# Altium PCB PCB1.PcbDoc
Units mm, origin at the board's own origin, x right, y up, seen from the top; angles counter-clockwise.
Board outline 67 x 48 mm, 2 copper layers (Top Layer, Bottom Layer); 55 components, 52 nets, 191 pads, 26 vias.
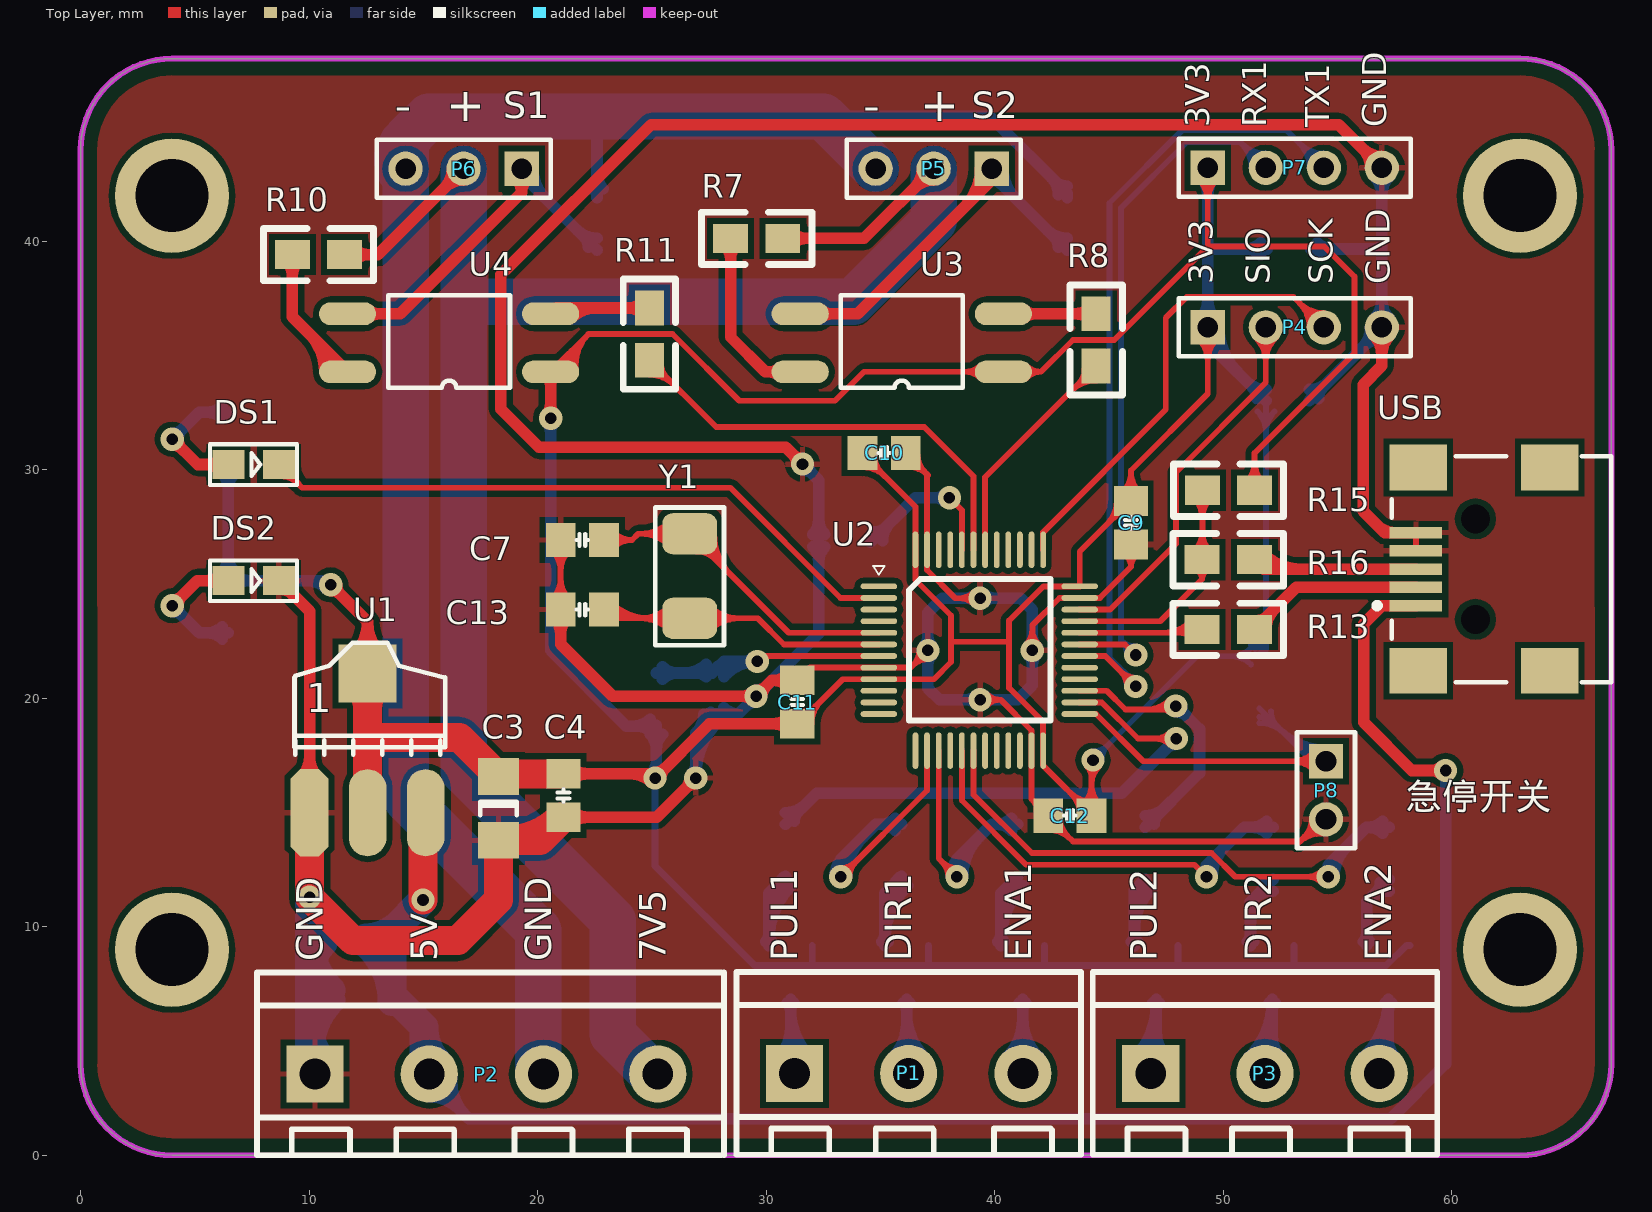
[diagram p0: Top Layer view]
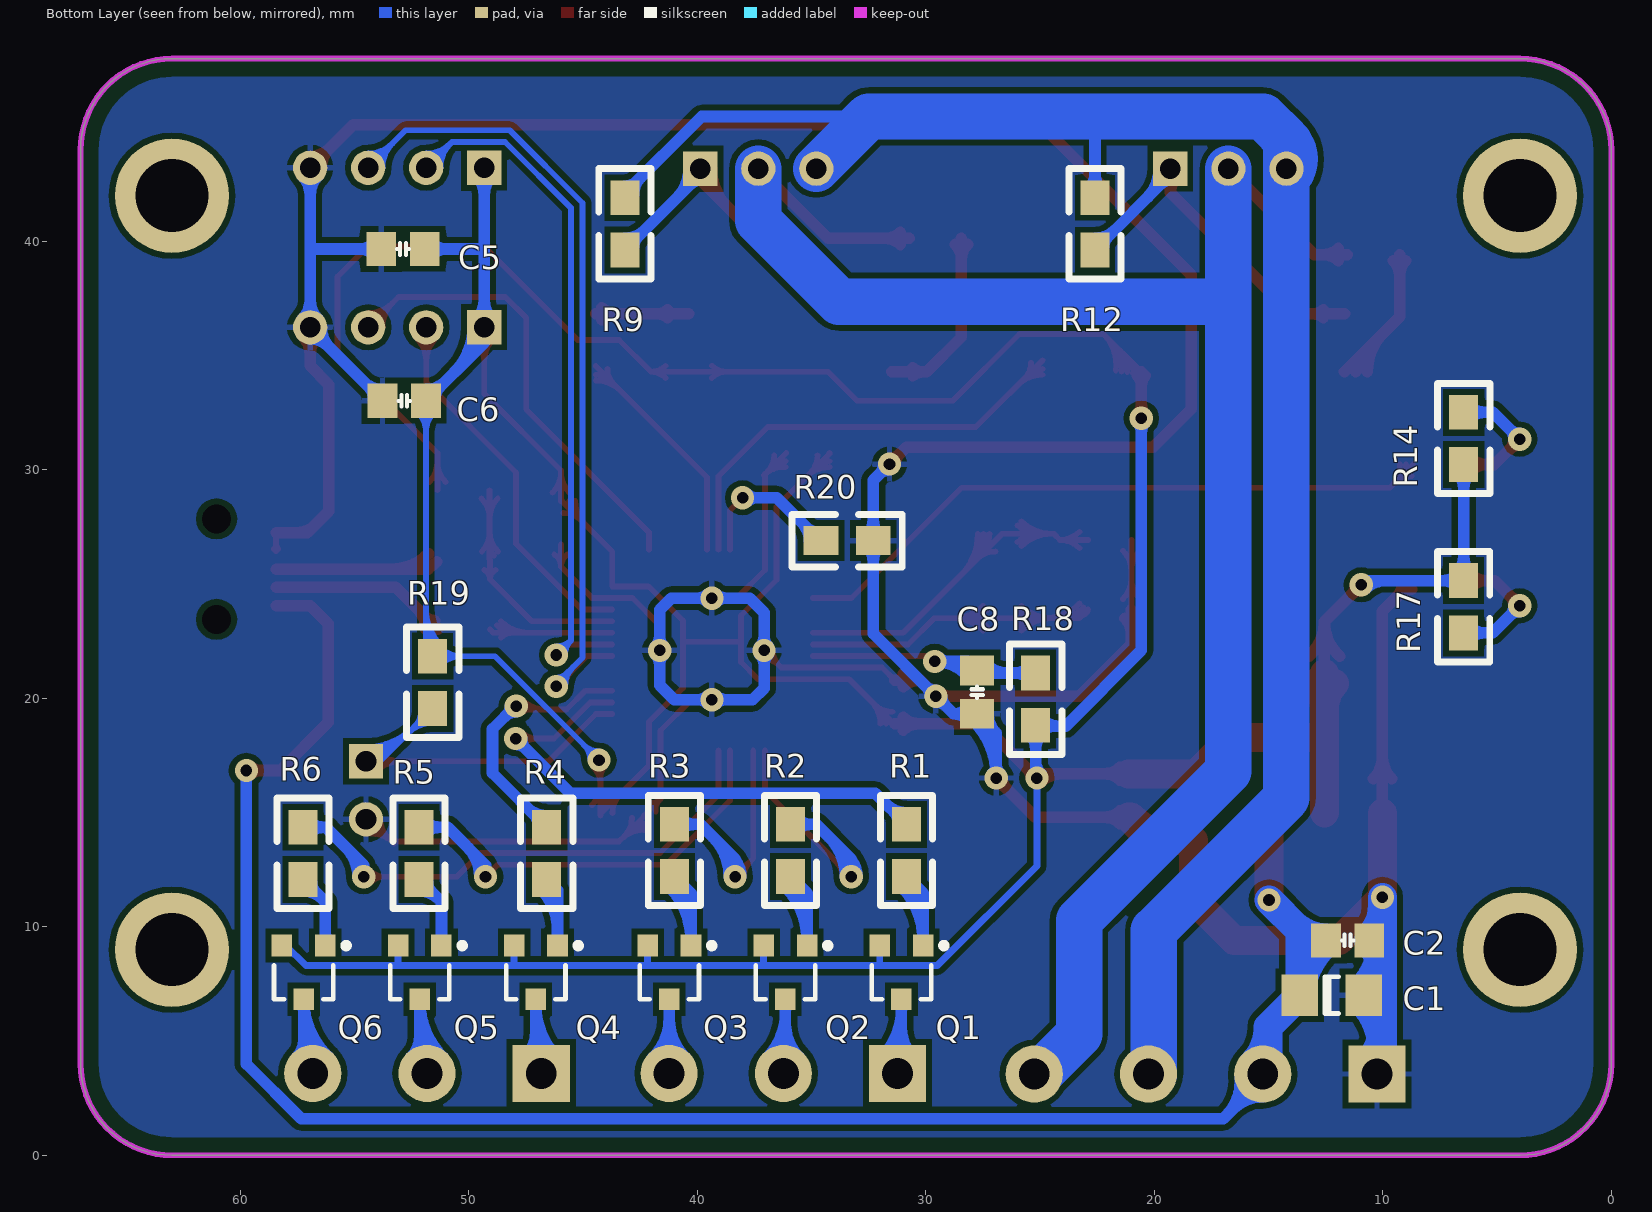
[diagram p1: Bottom Layer view, seen from below]

## Layer stack, top to bottom
Top Layer: signal copper 0.0356
Dielectric: dielectric 0.32, FR-4, Dk 4.8
Bottom Layer: signal copper 0.0356

## Board outline
0,4 0,44 cw(c4,44) 4,48 63,48 cw(c63,44) 67,44 67,4 cw(c63,4) 63,0 4,0 cw(c4,4)

## Design rules (kind name [scope] priority, off if disabled: settings)
Clearance [All] p1: gap=0.254
HoleSize [All] p1: absolutevalues=TRUE maxlimit=25.4 minlimit=0.025 maxpercent=80.000 minpercent=20.000
MinimumSolderMaskSliver [All] p1: minsoldermaskwidth=0.051
PolygonConnect [All] p1: connectstyle=Relief reliefconductorwidth=0.254 reliefentries=4 polygonreliefangle="90 Angle"
RoutingVias [All] p1: holewidth=0.508 width=1.016 viastyle="Through Hole" minholewidth=0.406 minwidth=0.508 maxholewidth=0.711 maxwidth=1.27
SilkscreenOverComponentPads [All] p1: minsilkscreentomaskgap=0
SolderMaskExpansion [All] p1: expansion=0.102
TestPointUsage [All] p1: valid=0 allowmultiple=FALSE
Testpoint [All] p1: side=15 testpointundercomponent=TRUE minsize=1.016 maxsize=2.54 preferedsize=1.524 minholesize=0 maxholesize=1.016 preferedholesize=0.813 testpointgrid=0.025 style=1023 order=0-112345678
Width [All] p1: maxlimit=2.54 minlimit=0.254 preferedwidth=0.254
21 further rules are at their usual default settings.

## Components (designator, comment, footprint, x,y, rotation, side; value= is the part's Value field where it differs from the comment)
C1 "Cap Pol" 钽电容 14.594,5.85 r90 bottom
C2 "104" 0805C 11.546,9.406 r0 bottom
C3 "Cap Pol" 钽电容 17.134,17.534 r0 top
C4 "104" 0805C 21.133,15.748 r90 top
C5 "104" 0805C 52.889,39.665 r0 bottom
C6 "104" 0805C 52.832,33.02 r0 bottom
C7 "20pF" 0805C 21.96,26.932 r0 top
C8 "104" 0805C 27.762,20.269 r270 bottom
C9 "104" 0805C 45.974,27.686 r270 top
C10 "104" 0805C 35.168,30.742 r0 top
C11 "104" 0805C 31.369,19.837 r90 top
C12 "104" 0805C 43.296,14.867 r180 top
C13 "20pF" 0805C 21.96,23.884 r0 top
DS1 "LED1" SMDLED 6.466,30.234 r0 top
DS2 "LED1" SMDLED 6.466,25.154 r0 top
P1 "电机1接口" KF301-3P 31.242,3.581 r0 top
P2 "4P接线端子" KF301-4P 10.262,3.556 r0 top
P3 "电机2接口" KF301-3P 46.838,3.581 r0 top
P4 "SWD" HDR1X4 49.333,36.236 r0 top
P5 "Header 3" HDR1X3 39.878,43.18 r180 top
P6 "Header 3" HDR1X3 19.304,43.18 r180 top
P7 "串口" HDR1X4 49.333,43.221 r0 top
P8 "Header 2" HDR1X2 54.508,17.247 r270 top
Q1 "S8550" SOT-23R 31.074,8.136 r0 bottom
Q2 "S8550" SOT-23R 36.154,8.136 r0 bottom
Q3 "S8550" SOT-23R 41.234,8.136 r0 bottom
Q4 "S8550" SOT-23R 47.076,8.136 r0 bottom
Q5 "S8550" SOT-23R 52.156,8.136 r0 bottom
Q6 "S8550" SOT-23R 57.236,8.136 r0 bottom
R1 "4.7K" 0805 30.85,14.486 r270 bottom
R2 "4.7K" 0805 35.93,14.486 r270 bottom
R3 "4.7K" 0805 41.01,14.486 r270 bottom
R4 "4.7K" 0805 46.598,14.359 r270 bottom
R5 "4.7K" 0805 52.186,14.359 r270 bottom
R6 "4.7K" 0805 57.266,14.359 r270 bottom
R7 "470R" 0805 28.448,40.132 r0 top
R8 "1k" 0805 44.45,34.544 r90 top
R9 "1K" 0805 43.18,39.624 r90 bottom
R10 "470R" 0805 9.271,39.421 r0 top
R11 "1k" 0805 24.892,34.798 r90 top
R12 "1K" 0805 22.606,39.624 r90 bottom
R13 "22R" 0805 51.372,23.017 r180 top
R14 "1K" 0805 6.467,30.232 r90 bottom
R15 "1.5K" 0805 49.098,29.108 r0 top
R16 "22R" 0805 51.372,26.065 r180 top
R17 "1K" 0805 6.467,25.152 r270 bottom
R18 "10K" 0805 25.197,21.107 r270 bottom
R19 "10K" 0805 51.587,21.844 r270 bottom
R20 "10K" 0805 32.309,26.899 r0 bottom
U1 "AMS1117-3.3" AMS1117 10.022,14.994 r0 top
U2 "STM32F103C8T6" LQF48 34.152,25.027 r0 top
U3 "TLP521-1" SOP-4_(TLP521) 40.386,34.29 r180 top
U4 "TLP521-1" SOP-4_(TLP521) 20.574,34.29 r180 top
USB "USB" USB/SM0.8-6H5 66.294,25.654 r0 top
Y1 "8MHz" SMD-5032 26.659,23.503 r90 top

## Footprints (in the part's own frame and the unit in brackets; to place one, negate y for a bottom-side part, rotate by r counter-clockwise, add the part's x,y. Pads: shape width x height; smd on the part's side, far side on the other; paste and mask are expansions set on the pad)
0805 [mil]
  rect 60x50 smd: 1(0,-0.06) 2(90,-0.06)
  silkscreen extent -50,-45 140,45
0805C [mm] "Chip Capacitor; Body 2.0 x 1.2 mm (LxW typ)"
  rect 1.3x1.5 smd: 1(-0.95,0) 2(0.95,0)
  silkscreen extent -0.25,-0.25 0.25,0.25
AMS1117 [mil]
  oct 65x150 smd: 1(0.03,-0.06)
  oval 65x150 smd: 2(100.03,-0.06) 3(200.03,-0.06)
  rect 100x100 smd: 4(100.03,239.94)
  silkscreen extent -26,100 234,293
HDR1X2 [mm] "Connector; Header; 2 Position"
  rect 1.5x1.5 hole 0.9: 1(0,0)
  round 1.5 hole 0.9: 2(2.54,0)
  silkscreen extent -1.27,-1.27 3.81,1.27
HDR1X3 [mm] "Connector; Header; 3 Position"
  rect 1.5x1.5 hole 0.9: 1(0,0)
  round 1.5 hole 0.9: 2(2.54,0) 3(5.08,0)
  silkscreen extent -1.27,-1.27 6.35,1.27
HDR1X4 [mm] "Connector; Header; 4 Position"
  rect 1.5x1.5 hole 0.9: 1(0,0)
  round 1.5 hole 0.9: 2(2.54,0) 3(5.08,0) 4(7.62,0)
  silkscreen extent -1.27,-1.27 8.89,1.27
KF301-3P [mm]
  rect 2.5x2.5 hole 1.35: 1(0,0)
  round 2.5 hole 1.35: 2(5,0) 3(10,0)
  silkscreen extent -2.54,-3.56 12.54,4.44
KF301-4P [mm]
  rect 2.5x2.5 hole 1.35: 1(0,0)
  round 2.5 hole 1.35: 2(5,0) 3(10,0) 4(15,0)
  silkscreen extent -2.54,-3.56 17.9,4.44
LQF48 [mm]
  oval 1.6x0.25 smd: 1(0.787,-0.127) 2(0.787,-0.635) 3(0.787,-1.143) 4(0.787,-1.651) 5(0.787,-2.159) 6(0.787,-2.667) 7(0.787,-3.175) 8(0.787,-3.683) 9(0.787,-4.191) 10(0.787,-4.699) 11(0.787,-5.207) 12(0.787,-5.715) 25(9.576,-5.715) 26(9.576,-5.207) 27(9.576,-4.699) 28(9.576,-4.191) 29(9.576,-3.683) 30(9.576,-3.175) 31(9.576,-2.667) 32(9.576,-2.159) 33(9.576,-1.651) 34(9.576,-1.143) 35(9.576,-0.635) 36(9.576,-0.127)
  oval 0.25x1.6 smd: 13(2.388,-7.315) 14(2.896,-7.315) 15(3.404,-7.315) 16(3.912,-7.315) 17(4.42,-7.315) 18(4.928,-7.315) 19(5.436,-7.315) 20(5.944,-7.315) 21(6.452,-7.315) 22(6.96,-7.315) 23(7.468,-7.315) 24(7.976,-7.315) 37(7.976,1.473) 38(7.468,1.473) 39(6.96,1.473) 40(6.452,1.473) 41(5.944,1.473) 42(5.436,1.473) 43(4.928,1.473) 44(4.42,1.473) 45(3.912,1.473) 46(3.404,1.473) 47(2.896,1.473) 48(2.388,1.473)
  silkscreen extent 0.53,-6 8.3,0.76
SMD-5032 [mm]
  rrect50% 1.8x2.4 smd: 1(0,0) 2(3.7,0)
  silkscreen extent -1.17,-1.5 4.85,1.5
SMDLED [mm]
  rect 1.4x1.27 smd: 1(0.001,-0.002) 2(2.211,-0.002)
  silkscreen extent -0.8,-0.89 3.01,0.89
SOP-4_(TLP521) [mm]
  oval 2.5x1 smd: 1(0,0) 2(0,-2.54) 3(8.89,-2.54) 4(8.89,0)
  silkscreen extent 1.78,-3.36 7.11,0.7
SOT-23R [mm]
  rect 0.9x0.95 smd: 1(0.95,-1.048) 2(-0.95,-1.048) 3(0,1.302)
  silkscreen extent -1.98,-1.17 1.3,1.3
USB/SM0.8-6H5 [mm]
  rect 2.3x0.5 smd: 1(-7.85,-1.6) 2(-7.85,-0.8) 3(-7.85,0) 4(-7.85,0.8) 5(-7.85,1.6)
  rect 2.5x2 smd: 6(-7.75,4.45) 7(-1.996,4.45) 8(-7.75,-4.45) 9(-1.996,-4.45)
  round 0.6 hole 1.27 unplated: MH1(-5.25,2.2) MH2(-5.25,-2.2)
  silkscreen extent -9.67,-4.95 0.7,4.95
钽电容 [mm]
  rect 1.8x1.6 smd: 1(1.157,-0.955) 2(1.157,-3.755)
  silkscreen extent 0.36,-2.65 1.96,-2.05

## Part data
C2 C4 C5 C6 C7 C8 C9 C10 C11 C12 C13: library part C
DS1 DS2: library part LED2, "Typical RED, GREEN, YELLOW, AMBER GaAs LED"
P1 P3: library part 3P接线端子
P4 P7: library part "Header 4", "Header, 4-Pin"
P5 P6: "Header, 3-Pin"
P8: "Header, 2-Pin"
Q1 Q2 Q3 Q4 Q5 Q6: library part PNP, "8550/BCW68"
R1 R2 R3 R4 R5 R6 R7 R8 R9 R10 R11 R12 R13 R14 R15 R16 R17 R18 R19 R20: library part R_1
U1: library part AMS1117
USB: library part USB5
Y1: library part XTAL

## Free pads (board coordinates)
  round 5 hole 3.2: 0(4,9) 1(4,42) 2(63,42) 3(63,9)

## Via types
v1: diameter 1.016, hole 0.508, Top Layer to Bottom Layer, tented both sides, 26 vias

## Nets (pads, with @x,y where several pads share a name; then routed paths per layer and width w, separated by ;. In a path a pad name is that pad's centre, name@x,y a point inside that pad or via, vN(x,y) a via of type N, cw(c..) or ccw(c..) an arc to the next point about the centre after c; other vN are vias at no path point)
3.3V: C3.1 C4.2 C5.1 C6.1 C9.1 C10.1 C11.1 C12.1 P4.1 P7.1 Q1.1 Q2.1 Q3.1 Q4.1 Q5.1 Q6.1 R14.1 R15.2 R17.1 R18.2 R19.1 U1.2 U1.4 U2.9 U2.24 U2.36 U2.48 U3.1 U4.1 | length 320.2
  Top Layer w0.254: U4.1 22.225,35.941 ; U4.1@20.688,34.198 cw(c21.046,34.25) U4.1@20.79,34.506 ; U4.1@20.939,34.235 cw(c21.673,34.34) 21.149,34.865 ; U4.1@21.19,34.271 cw(c22.3,34.43) 21.507,35.223 ; U4.1@21.442,34.307 cw(c22.928,34.521) 21.866,35.582 ; U4.1@21.693,34.343 cw(c23.555,34.611) 22.225,35.941 ; C11.1 31.408,18.887 33.356,20.836 U2.9 37.346,20.836 38.1,21.59 38.1,22.479 ; C11.1@31.469,19.41 ccw(c31.469,20.525) 32.257,19.737 ; C11.1@31.738,18.887 cw(c32.535,18.887) C11.1@31.971,19.451 ; C11.1@31.992,18.887 cw(c33.402,18.887) 32.405,19.885 ; C10.1@34.218,30.119 cw(c34.218,28.709) 35.215,29.706 ; C10.1@34.218,30.373 cw(c34.218,29.576) C10.1@34.782,30.14 ; C10.1 34.218,30.703 36.54,28.382 U2.48 36.54,25.182 38.1,23.622 38.1,22.479 ; C10.1@34.741,30.642 ccw(c35.856,30.642) 35.068,29.854 ; U3.1@39.372,34.026 ccw(c38.736,33.39) 38.736,34.29 ccw(c38.736,35.19) U3.1@39.372,34.554 ; U3.1@41.4,34.026 cw(c42.036,33.39) 42.036,34.29 cw(c42.036,35.19) U3.1@41.4,34.554 ; 43.3,15.882 ccw(c44.246,16.827) C12.1@44.246,15.49 ; 43.375,15.807 cw(c42.535,14.967) C12.1@43.723,14.967 ; C12.1@43.734,15.448 ccw(c44.246,15.96) C12.1@44.246,15.236 ; C12.1@43.876,15.337 ccw(c42.983,16.23) 44.246,16.23 ccw(c45.509,16.23) C12.1@44.616,15.337 ; v1@44.041,17.028 cw(c43.546,16.533) 44.246,16.533 ; C12.1 C12.1@44.246,14.936 ; 44.246,16.222 cw(c45.386,16.222) v1@44.58,17.028 ; v1(44.31,17.297) 44.246,17.233 C12.1@44.246,14.936 ; 44.938,27.639 ccw(c43.941,28.636) C9.1@45.351,28.636 ; 45.086,27.786 cw(c45.874,26.998) C9.1@45.874,28.113 ; C9.1@45.372,28.072 ccw(c44.808,28.636) C9.1@45.605,28.636 ; C9.1@45.604,29.006 ccw(c44.711,29.899) 45.974,29.899 ccw(c47.237,29.899) C9.1@46.344,29.006 ; P4.1@48.892,35.795 cw(c47.829,34.732) 49.333,34.732 cw(c50.837,34.732) P4.1@49.774,35.795 ; P7.1@48.892,42.78 cw(c47.829,41.717) 49.333,41.717 cw(c50.837,41.717) P7.1@49.774,42.78 ; P4.1@49.072,35.975 cw(c48.442,35.345) 49.333,35.345 cw(c50.224,35.345) P4.1@49.594,35.975 ; P7.1@49.072,42.96 cw(c48.442,42.33) 49.333,42.33 cw(c50.224,42.33) P7.1@49.594,42.96 ; P4.1 49.333,33.333 45.974,29.974 C9.1 45.935,28.636 43.728,26.429 U2.36 42.139,24.9 40.64,23.401 40.64,22.479 ; P7.1 49.333,39.776 ; R15.2@51.025,29.466 ccw(c50.158,30.333) 51.384,30.333 ccw(c52.611,30.333) R15.2@51.743,29.466 ; R15.2 51.384,30.734 55.753,35.103 55.753,38.456 54.433,39.776 49.333,39.776 ; 22.225,35.941 25.91,35.941 28.831,33.02 33.02,33.02 34.29,34.29 U3.1 42.039,34.29 43.436,35.687 45.244,35.687 49.333,39.776 ; 38.1,22.479 40.64,22.479 ; 40.64,22.479 40.64,20.447 42.128,18.959 U2.24 42.128,17.054 C12.1@44.246,14.936
  Top Layer w0.508: v1@10.947,24.714 cw(c10.947,24.101) 11.381,24.535 cw(c11.815,24.968) v1@11.201,24.968 ; v1(10.947,24.968) 12.563,23.353 ; U1.4@11.887,21.847 ccw(c10.548,23.353) 12.563,23.353 ; U1.4 12.563,23.353 ; U1.4@13.238,21.847 cw(c14.578,23.353) 12.563,23.353 ; v1@20.394,32.438 ccw(c19.961,32.871) 20.574,32.871 ccw(c21.187,32.871) v1@20.754,32.438 ; U4.1@20.4,34.116 cw(c19.98,33.696) 20.574,33.696 cw(c21.168,33.696) U4.1@20.748,34.116 ; v1(20.574,32.258) U4.1 ; C4.2 v1@24.958,16.698 ; C4.2@21.513,16.418 cw(c22.189,15.742) 22.189,16.698 cw(c22.189,17.654) C4.2@21.513,16.978 ; 24.079,16.698 cw(c24.079,15.443) v1@24.966,16.33 ; v1(25.146,16.51) 27.523,18.887 C11.1 ; v1@25.146,16.764 ccw(c25.146,17.377) 25.58,16.944 ccw(c26.013,16.51) v1@25.4,16.51 ; C11.1@30.989,18.607 ccw(c30.313,17.931) 30.313,18.887 ccw(c30.313,19.843) C11.1@30.989,19.167
  Top Layer w1.27: U1.4@12.114,20.639 cw(c11.03,19.555) 12.563,19.555 cw(c14.096,19.555) U1.4@13.012,20.639 ; U1.2 12.563,18.288 ; U1.4 12.563,18.288 ; C4.2 18.41,16.698 C3.1 16.582,18.288 12.563,18.288
  Bottom Layer w0.254: v1(44.31,17.297) 48.857,21.844 R19.1 51.882,22.137 C6.1 ; v1@44.31,17.678 ccw(c44.31,18.598) 44.961,17.948 ccw(c45.611,17.297) v1@44.691,17.297 ; R19.1@51.23,21.485 ccw(c50.363,20.618) 50.363,21.844 ccw(c50.363,23.07) R19.1@51.23,22.203 ; R19.1@51.23,22.33 ccw(c49.655,23.905) 51.882,23.905 ; R19.1@51.409,22.151 ccw(c50.269,23.292) 51.882,23.292 ; C6.1@51.512,32.55 cw(c50.619,31.657) 51.882,31.657 cw(c53.145,31.657) C6.1@52.252,32.55 ; R19.1@51.589,21.971 ccw(c50.882,22.678) 51.882,22.678
  Bottom Layer w0.305: v1(25.146,16.51) 25.146,12.662 29.505,8.303 57.142,8.303 58.023,9.184 Q6.1 ; 32.024,8.326 Q1.1 ; 37.104,8.406 Q2.1 ; 42.184,8.486 Q3.1 ; 48.026,8.328 Q4.1 ; 53.106,8.408 Q5.1
  Bottom Layer w0.508: R14.1@6.196,29.836 cw(c5.545,29.186) 6.465,29.186 cw(c7.385,29.186) R14.1@6.735,29.836 ; R17.1@6.199,25.549 ccw(c5.556,26.191) 6.465,26.191 ; R17.1@6.465,25.156 R14.1 ; 6.465,26.207 ccw(c7.396,26.207) R17.1@6.738,25.549 ; R17.1 v1@10.763,25.152 ; R17.1@6.738,24.883 cw(c7.388,24.233) 7.388,25.152 cw(c7.388,26.072) R17.1@6.738,25.422 ; 9.89,25.152 cw(c9.89,23.91) v1@10.768,24.789 ; v1@20.394,32.078 cw(c19.961,31.645) 20.574,31.645 cw(c21.187,31.645) v1@20.754,32.078 ; v1(20.574,32.258) 20.574,22.098 23.89,18.782 R18.2@25.16,18.782 ; 24.185,18.782 ccw(c24.185,19.835) R18.2@24.929,19.091 ; 24.373,18.782 cw(c24.373,17.996) R18.2@24.929,18.552 ; R18.2@24.929,18.425 cw(c24.279,17.775) 25.198,17.775 cw(c26.118,17.775) R18.2@25.468,18.425 ; v1@24.966,16.69 ccw(c24.406,17.25) 25.198,17.25 ; v1(25.146,16.51) 25.198,16.562 R18.2 ; P4.1@48.982,36.587 ccw(c48.136,37.433) 49.333,37.433 ccw(c50.53,37.433) P4.1@49.684,36.587 ; P7.1@48.982,42.87 cw(c48.136,42.024) 49.333,42.024 cw(c50.53,42.024) P7.1@49.684,42.87 ; P4.1@49.321,36.236 ccw(c50.902,36.236) 49.784,35.118 ; P7.1 49.333,39.624 ; P4.1@49.829,36.236 ccw(c52.637,36.236) 50.651,34.251 ; 51.035,33.867 ccw(c51.882,34.713) C6.1@51.882,33.516 ; C6.1@51.277,33.625 cw(c50.771,33.12) C6.1@51.486,33.12 ; C5.1@51.659,39.385 ccw(c50.983,38.709) 50.983,39.665 ccw(c50.983,40.621) C5.1@51.659,39.945 ; C6.1 49.333,35.569 P4.1 49.333,39.624 ; C5.1 49.374,39.665 49.333,39.624
7.5V_GND: P2.3 P5.3 P6.3 R9.2 R12.2 | length 87.3
  Bottom Layer w0.508: R12.2@22.335,42.306 ccw(c21.685,42.957) 22.604,42.957 ccw(c23.524,42.957) R12.2@22.874,42.306 ; R12.2 22.604,45.464 ; 32.512,45.466 39.81,45.466 43.178,42.098 R9.2 ; 42.485,42.792 cw(c41.73,42.037) R9.2@42.797,42.037 ; R9.2@42.632,42.644 ccw(c43.178,43.19) R9.2@43.178,42.418
  Bottom Layer w2.032: P6.3@13.958,43.18 cw(c16.382,43.18) 14.668,44.894 ; P6.3@13.983,43.066 cw(c15.087,43.587) 14.224,44.45 ; P2.3@20.022,3.564 20.022,9.848 14.224,15.646 P6.3 14.224,44.45 ; P5.3 32.512,45.466 15.24,45.466 14.224,44.45
+5V: C1.1 C2.2 P2.2 U1.3 USB.1 | length 96.2
  Top Layer w0.508: USB.1 56.947,24.054 56.159,23.266 56.159,18.948 58.268,16.84 v1(59.741,16.84) ; v1@59.561,16.661 ccw(c59.128,16.227) 59.128,16.84 ccw(c59.128,17.453) v1@59.561,17.02
  Top Layer w1.27: v1(14.986,11.176) U1.3@14.986,14.876
  Bottom Layer w0.508: P2.2@15.022,3.564 16.986,1.6 57.343,1.6 59.741,3.998 v1(59.741,16.84) ; P2.2@15.262,2.56 cw(c15.262,0.715) 16.567,2.019 ; P2.2@15.747,3.506 ccw(c17.019,3.375) 16.115,2.471 ; P2.2@16.252,3.454 ccw(c18.388,3.234) 16.87,1.716
  Bottom Layer w1.27: C2.2@12.486,9.295 cw(c10.23,6.739) C1.1@13.639,6.739 ; C2.2@12.496,9.521 ccw(c12.496,11.537) 13.921,10.111 ; C2.2@12.5,9.521 ccw(c12.8,10.668) 13.639,9.829 ; v1(14.986,11.176) 13.639,9.829 ; P2.2@15.022,3.564 15.022,5.624 C1.1 13.639,9.829 ; 15.022,5.619 ccw(c17.325,5.619) P2.2@15.696,3.991
+7.5V: P2.4 P5.2 P6.2 R7.2 R10.2 | length 88.6
  Top Layer w0.508: R10.2 13.003,39.419 P6.2 ; R10.2@11.953,39.15 cw(c12.604,38.499) 12.604,39.419 cw(c12.604,40.339) R10.2@11.953,39.689 ; P6.2@16.268,43.18 cw(c15.071,43.18) 15.917,42.333 cw(c16.764,41.487) P6.2@16.764,42.684 ; R7.2 34.288,40.13 P5.2 ; R7.2@31.13,39.861 cw(c31.781,39.211) 31.781,40.13 cw(c31.781,41.05) R7.2@31.13,40.4 ; P5.2@36.842,43.18 cw(c35.645,43.18) 36.491,42.333 cw(c37.338,41.487) P5.2@37.338,42.684
  Bottom Layer w2.032: P6.2 16.764,37.363 ; P2.4@25.022,3.564 23.293,5.293 23.293,10.285 16.764,16.815 16.764,37.363 ; P5.2 37.338,40.894 33.807,37.363 16.764,37.363
BOOT0: R20.2 U2.44 | length 9.2
  Top Layer w0.254: v1(38.024,28.778) 38.572,28.23 U2.44
  Bottom Layer w0.508: R20.2@34.569,26.823 36.524,28.778 v1(38.024,28.778) ; R20.2@34.722,27.281 ccw(c34.722,28.017) R20.2@35.242,27.497 ; R20.2@35.103,26.9 cw(c36.207,26.9) 35.426,27.681 ; v1@37.844,28.599 ccw(c37.411,28.165) 37.411,28.778 ccw(c37.411,29.391) v1@37.844,28.958
DIR1: P1.2 Q2.3 | length 8.9
  Bottom Layer w0.508: P1.2@35.538,4.286 ccw(c34.051,5.773) 36.154,5.773 ; Q2.3@36.015,6.67 cw(c35.68,6.336) 36.154,6.336 cw(c36.627,6.336) Q2.3@36.292,6.67 ; P1.2@36.154,3.641 Q2.3 ; 36.154,4.973 ccw(c37.634,4.973) P1.2@36.587,3.926 ; 36.154,6.199 ccw(c38.86,6.199) P1.2@36.946,4.286
DIR2: P3.2 Q5.3 | length 9.5
  Bottom Layer w0.508: P3.2@51.133,4.286 ccw(c48.665,6.754) Q5.3@52.156,6.754 ; P3.2@51.493,3.926 ccw(c49.892,5.527) 52.156,5.527 ; Q5.3@52.017,6.67 cw(c51.682,6.336) 52.156,6.336 cw(c52.629,6.336) Q5.3@52.294,6.67 ; P3.2@52.156,3.614 Q5.3 ; 52.156,5.218 ccw(c53.474,5.218) P3.2@52.542,4.286
ENA1: P1.3 Q3.3 | length 7.8
  Bottom Layer w0.508: P1.3@40.538,4.286 ccw(c38.858,5.966) 41.234,5.966 ; Q3.3@41.095,6.67 cw(c40.76,6.336) 41.234,6.336 cw(c41.707,6.336) Q3.3@41.372,6.67 ; P1.3@41.234,3.567 Q3.3 ; 41.234,6.006 ccw(c43.667,6.006) P1.3@41.946,4.286
ENA2: P3.3 Q6.3 | length 9.5
  Bottom Layer w0.508: P3.3@56.151,4.303 ccw(c53.74,6.834) 57.236,6.834 P3.3@57.236,3.694 ; P3.3@56.501,3.935 ccw(c54.869,5.649) 57.236,5.649 ; Q6.3@57.097,6.67 cw(c56.762,6.336) 57.236,6.336 cw(c57.709,6.336) Q6.3@57.374,6.67 ; 57.236,5.025 ccw(c58.281,5.025) P3.3@57.542,4.286
GND: C1.2 C2.1 C3.2 C4.1 C5.2 C6.2 C7.1 C8.2 C9.2 C10.2 C11.2 C12.2 C13.1 DS2.2 P2.1 P4.4 P7.4 P8.2 R20.1 U1.1 U2.8 U2.23 U2.35 U2.47 USB.4 USB.5 | length 305.9
  Top Layer w0.254: C13.1@20.64,24.354 ccw(c19.747,25.247) 21.01,25.247 ccw(c22.273,25.247) C13.1@21.38,24.354 ; C7.1@20.64,26.462 cw(c19.747,25.569) 21.01,25.569 cw(c22.273,25.569) C7.1@21.38,26.462 ; C13.1 C7.1 ; C11.2 31.926,21.344 U2.8 36.33,21.344 v1(37.084,22.098) ; C10.2 37.048,29.812 U2.47 37.048,25.618 38.281,24.384 v1(39.37,24.384) ; C10.2@36.135,30.374 cw(c36.181,29.641) C10.2@36.7,30.16 ; C10.2@36.151,30.12 cw(c36.228,28.893) 37.098,29.762 ; C10.2@36.641,30.642 ccw(c37.662,30.642) 36.94,29.92 ; v1@36.703,22.098 cw(c35.783,22.098) 36.434,21.448 cw(c37.084,20.797) v1@37.084,21.717 ; v1@39.101,24.115 ccw(c38.45,23.464) 38.45,24.384 ccw(c38.45,25.304) v1@39.101,24.653 ; v1(39.37,19.939) 40.275,19.939 ; v1@39.643,19.673 cw(c40.275,19.055) 40.275,19.939 ; v1@39.643,20.205 ccw(c40.275,20.823) 40.275,19.939 ; v1@41.387,22.367 ccw(c40.736,23.018) 41.656,23.018 ccw(c42.576,23.018) v1@41.925,22.367 ; v1(41.656,22.098) 41.656,23.203 42.845,24.392 U2.35 44.61,24.392 45.974,25.756 ; C12.2@41.83,15.05 ccw(c41.266,15.14) 41.67,15.543 ccw(c41.977,15.851) C12.2@42.144,15.45 ; C12.2@42.346,14.244 cw(c42.346,12.834) 43.343,13.831 ; C12.2@42.346,14.498 cw(c42.346,13.701) C12.2@42.91,14.265 ; C12.2@42.869,14.767 ccw(c43.984,14.767) 43.196,13.979 ; C9.2@45.683,26.302 cw(c45.317,25.756) 45.974,25.756 ; C9.2 45.974,25.756 ; C9.2@46.265,26.302 ccw(c46.631,25.756) 45.974,25.756 ; 53.271,13.647 cw(c54.341,12.578) P8.2@54.459,14.086 ; 53.571,13.947 ccw(c52.811,14.707) P8.2@53.885,14.707 ; 53.661,14.037 cw(c54.398,13.3) P8.2@54.479,14.339 ; P8.2 54.331,14.707 53.36,13.736 43.438,13.736 42.346,14.828 C12.2 41.62,15.593 U2.23 41.62,18.594 40.275,19.939 ; USB.4@58.357,26.541 ccw(c58.147,26.751) 58.444,26.751 ccw(c58.741,26.751) USB.4@58.531,26.541 ; USB.5@58.357,27.167 cw(c58.147,26.957) 58.444,26.957 cw(c58.741,26.957) USB.5@58.531,27.167 ; USB.4 USB.5
  Top Layer w0.508: DS2.2 10.023,23.806 U1.1 ; DS2.2@8.742,24.771 cw(c8.742,24.008) DS2.2@9.281,24.548 ; DS2.2@9.123,25.152 ccw(c10.2,25.152) 9.438,24.391 ; U1.1@9.619,16.476 ccw(c8.643,17.452) 10.023,17.452 ccw(c11.403,17.452) U1.1@10.427,16.476 ; C13.1@20.73,23.504 cw(c20.054,22.828) 21.01,22.828 cw(c21.966,22.828) C13.1@21.29,23.504 ; C13.1 21.01,22.373 23.292,20.091 v1(29.566,20.091) 30.262,20.787 C11.2 ; C4.1 25.212,14.798 v1(26.924,16.51) ; C4.1@21.513,14.518 cw(c22.189,13.842) 22.189,14.798 cw(c22.189,15.754) C4.1@21.513,15.078 ; v1@26.67,16.51 cw(c26.057,16.51) 26.49,16.076 cw(c26.924,15.643) v1@26.924,16.256 ; v1@29.386,19.912 ccw(c28.952,19.478) 28.952,20.091 ccw(c28.952,20.705) v1@29.386,20.271 ; v1@29.566,20.345 ccw(c29.566,20.959) 29.999,20.525 ccw(c30.433,20.091) v1@29.82,20.091 ; C11.2@30.989,20.507 ccw(c30.313,19.831) 30.313,20.787 ccw(c30.313,21.743) C11.2@30.989,21.067 ; v1@31.344,30.251 ccw(c30.73,30.251) 31.164,30.685 ccw(c31.598,31.119) v1@31.598,30.505 ; v1(31.598,30.251) 30.861,30.988 20.066,30.988 18.39,32.664 18.39,38.532 24.968,45.11 55.064,45.11 P7.4 ; P7.4@56.457,43.221 ccw(c55.26,43.221) 56.106,44.068 ccw(c56.953,44.914) P7.4@56.953,43.717 ; P4.4@56.602,35.885 cw(c55.756,35.039) 56.953,35.039 cw(c58.15,35.039) P4.4@57.304,35.885 ; 56.749,27.579 ccw(c57.544,28.375) USB.5@57.544,27.25 ; P4.4 56.953,34.55 56.134,33.731 56.134,28.194 57.074,27.254 USB.5
  Top Layer w1.27: U1.1@10.022,14.992 v1(10.022,11.292) 11.916,9.398 16.51,9.398 18.291,11.179 C3.2 20.114,13.779 C4.1 ; C3.2@18.537,13.779 ccw(c18.537,17.293) C4.1@21.022,14.809
  Bottom Layer w0.508: v1@26.744,16.69 ccw(c26.311,17.123) 26.924,17.123 ccw(c27.537,17.123) v1@27.104,16.69 ; v1(26.924,16.51) 26.924,18.481 C8.2 ; v1@26.924,16.581 cw(c30.4,16.581) C8.2@27.942,19.039 ; 26.924,17.807 cw(c29.174,17.807) C8.2@27.583,19.398 ; 26.974,18.531 ccw(c26.263,19.242) C8.2@27.267,19.297 ; C8.2@27.157,18.714 cw(c27.662,18.209) C8.2@27.662,18.923 ; C8.2@27.686,19.243 C8.2 ; C8.2@28.147,19.045 cw(c28.793,18.422) 28.793,19.319 ; C8.2@28.147,19.594 ccw(c28.793,20.216) 28.793,19.319 ; v1@29.312,20.091 cw(c28.698,20.091) 29.132,19.658 cw(c29.566,19.224) v1@29.566,19.837 ; v1@29.566,20.345 ccw(c29.566,20.959) 29.999,20.525 ccw(c30.433,20.091) v1@29.82,20.091 ; v1@31.598,29.997 cw(c31.598,29.384) 32.031,29.818 cw(c32.465,30.251) v1@31.852,30.251 ; v1(31.598,30.251) 32.309,29.54 R20.1 ; R20.1@32.039,26.631 cw(c31.389,25.98) 32.309,25.98 cw(c33.229,25.98) R20.1@32.578,26.631 ; R20.1@32.039,27.17 ccw(c31.389,27.82) 32.309,27.82 ccw(c33.229,27.82) R20.1@32.578,27.17 ; R20.1@32.309,26.949 R20.1 ; v1@36.904,21.918 cw(c36.471,21.485) 37.084,21.485 cw(c37.697,21.485) v1@37.264,21.918 ; v1@36.904,22.278 ccw(c36.471,22.711) 37.084,22.711 ccw(c37.697,22.711) v1@37.264,22.278 ; v1@39.19,19.759 ccw(c38.757,19.326) 38.757,19.939 ccw(c38.757,20.552) v1@39.19,20.119 ; v1@39.19,24.204 ccw(c38.757,23.771) 38.757,24.384 ccw(c38.757,24.997) v1@39.19,24.564 ; v1@39.55,19.759 cw(c39.983,19.326) 39.983,19.939 cw(c39.983,20.552) v1@39.55,20.119 ; v1@39.55,24.204 cw(c39.983,23.771) 39.983,24.384 cw(c39.983,24.997) v1@39.55,24.564 ; v1@41.476,21.918 cw(c41.043,21.485) 41.656,21.485 cw(c42.269,21.485) v1@41.836,21.918 ; v1@41.476,22.278 ccw(c41.043,22.711) 41.656,22.711 ccw(c42.269,22.711) v1@41.836,22.278 ; C6.2 56.953,36.191 P4.4 56.953,39.624 ; C6.2@53.782,33.516 ccw(c53.782,34.713) 54.629,33.867 ; C5.2 56.912,39.665 56.953,39.624 ; C5.2@54.119,39.385 cw(c54.795,38.709) 54.795,39.665 cw(c54.795,40.621) C5.2@54.119,39.945 ; C6.2@54.178,33.12 cw(c54.893,33.12) C6.2@54.387,33.625 ; 56.074,35.312 ccw(c55.151,36.236) P4.4@56.457,36.236 ; 56.183,35.421 cw(c56.953,34.651) P4.4@56.953,35.74 ; P4.4@56.602,36.587 ccw(c55.756,37.433) 56.953,37.433 ccw(c58.15,37.433) P4.4@57.304,36.587 ; P7.4@56.602,42.87 cw(c55.756,42.024) 56.953,42.024 cw(c58.15,42.024) P7.4@57.304,42.87 ; P7.4 56.953,39.624 ; C8.2 28.793,19.319 ; 28.793,19.319 v1(29.566,20.091) 32.309,22.835 R20.1 ; 37.084,20.447 v1(37.084,22.098) 37.084,23.749 37.719,24.384 v1(39.37,24.384) 41.148,24.384 41.656,23.876 v1(41.656,22.098) 41.656,20.574 41.021,19.939 v1(39.37,19.939) 37.592,19.939 37.084,20.447
  Bottom Layer w1.27: P2.1@10.022,3.564 v1(10.022,11.292) ; P2.1@10.022,4.535 cw(c13.211,4.535) C1.2@10.956,6.79 ; 10.022,5.619 ccw(c12.325,5.619) P2.1@10.696,3.991 ; 10.022,6.413 ccw(c10.145,6.413) C1.2@10.058,6.326 ; 10.022,7.601 cw(c10.145,7.601) C1.2@10.058,7.688 ; 10.022,7.884 cw(c12.018,7.884) C2.1@10.607,9.295 ; C2.1@10.022,9.479 ccw(c13.211,9.479) C1.2@10.956,7.224 ; v1@10.022,10.928 ccw(c12.018,10.928) C2.1@10.607,9.517
LED1: DS1.2 U2.2 | length 31.2
  Top Layer w0.254: DS1.2 9.693,29.216 28.442,29.216 33.264,24.394 34.937,24.394 U2.2 ; DS1.2@8.742,29.724 cw(c8.742,28.655) 9.498,29.411 ; DS1.2@8.996,30.232 ccw(c9.766,30.232) DS1.2@9.221,29.688 ; DS1.2@9.25,30.232 ccw(c10.633,30.232) 9.655,29.254
NetDS1_1: DS1.1 R14.2 | length 10.7
  Top Layer w0.508: v1@4.013,31.09 cw(c4.013,30.476) 4.447,30.91 cw(c4.88,31.344) v1@4.267,31.344 ; v1(4.013,31.344) 5.124,30.232 DS1.1 ; DS1.1@6.132,29.963 ccw(c5.482,29.313) 5.482,30.232 ccw(c5.482,31.152) DS1.1@6.132,30.502
  Bottom Layer w0.508: v1(4.013,31.344) 5.188,32.518 R14.2 ; v1@4.013,31.598 ccw(c4.013,32.211) 4.447,31.777 ccw(c4.88,31.344) v1@4.267,31.344 ; R14.2@6.196,32.249 ccw(c5.545,31.599) 5.545,32.518 ccw(c5.545,33.438) R14.2@6.196,32.788
NetDS2_1: DS2.1 R17.2 | length 10.7
  Top Layer w0.508: v1(4.013,24.054) 5.112,25.152 DS2.1 ; v1@4.013,24.308 ccw(c4.013,24.921) 4.447,24.487 ccw(c4.88,24.054) v1@4.267,24.054 ; DS2.1@6.132,24.883 ccw(c5.482,24.233) 5.482,25.152 ccw(c5.482,26.072) DS2.1@6.132,25.422
  Bottom Layer w0.508: v1@4.013,23.8 cw(c4.013,23.187) 4.447,23.62 cw(c4.88,24.054) v1@4.267,24.054 ; v1(4.013,24.054) 5.201,22.866 R17.2 ; R17.2@6.199,22.597 ccw(c5.549,21.947) 5.549,22.866 ccw(c5.549,23.786) R17.2@6.199,23.136
NetQ1_2: Q1.2 R1.2 | length 8.4
  Bottom Layer w0.508: Q1.2@29.985,9.348 ccw(c29.65,9.682) 30.124,9.682 ccw(c30.597,9.682) Q1.2@30.262,9.348 ; Q1.2 30.124,11.472 R1.2 ; Q1.2@30.124,9.396 cw(c33.529,9.396) R1.2@31.121,11.804 ; 30.124,10.622 cw(c32.303,10.622) R1.2@30.762,12.163
NetQ2_2: Q2.2 R2.2 | length 8.4
  Bottom Layer w0.508: Q2.2@35.065,9.348 ccw(c34.73,9.682) 35.204,9.682 ccw(c35.677,9.682) Q2.2@35.342,9.348 ; Q2.2 35.204,11.472 R2.2 ; Q2.2@35.204,9.396 cw(c38.609,9.396) R2.2@36.201,11.804 ; 35.204,10.622 cw(c37.383,10.622) R2.2@35.842,12.163
NetQ3_2: Q3.2 R3.2 | length 8.4
  Bottom Layer w0.508: Q3.2@40.145,9.348 ccw(c39.81,9.682) 40.284,9.682 ccw(c40.757,9.682) Q3.2@40.422,9.348 ; Q3.2 40.284,11.472 R3.2 ; Q3.2@40.284,9.396 cw(c43.689,9.396) R3.2@41.281,11.804 ; 40.284,10.622 cw(c42.463,10.622) R3.2@40.922,12.163
NetQ4_2: Q4.2 R4.2 | length 6.9
  Bottom Layer w0.508: Q4.2@45.987,9.348 ccw(c45.652,9.682) 46.126,9.682 ccw(c46.599,9.682) Q4.2@46.264,9.348 ; Q4.2 46.126,11.599 R4.2 ; 46.126,9.882 cw(c48.664,9.882) R4.2@46.869,11.677 ; 46.126,11.108 cw(c47.437,11.108) R4.2@46.51,12.036
NetQ5_2: Q5.2 R5.2 | length 5.5
  Bottom Layer w0.508: Q5.2@51.067,9.348 ccw(c50.732,9.682) 51.206,9.682 ccw(c51.679,9.682) Q5.2@51.344,9.348 ; Q5.2 51.206,11.091 R5.2 ; 51.32,11.206 cw(c52.188,10.339) R5.2@52.188,11.565 ; R5.2@51.627,11.512 ccw(c51.193,11.946) R5.2@51.807,11.946
NetQ6_2: Q6.2 R6.2 | length 5.5
  Bottom Layer w0.508: Q6.2@56.147,9.348 ccw(c55.812,9.682) 56.286,9.682 ccw(c56.759,9.682) Q6.2@56.424,9.348 ; Q6.2 56.286,11.091 R6.2 ; 56.4,11.206 cw(c57.268,10.339) R6.2@57.268,11.565 ; R6.2@56.707,11.512 ccw(c56.273,11.946) R6.2@56.887,11.946
NetR7_1: R7.1 U3.4 | length 10.4
  Top Layer w0.508: R7.1@28.179,39.861 cw(c27.528,39.211) 28.448,39.211 cw(c29.368,39.211) R7.1@28.717,39.861 ; R7.1 28.448,35.814 29.972,34.29 U3.4 ; U3.4@30.572,34.116 ccw(c30.152,33.696) 30.152,34.29 ccw(c30.152,34.884) U3.4@30.572,34.464
NetR8_2: R8.2 U3.2 | length 6.4
  Top Layer w0.508: U3.2 R8.2 ; U3.2@41.31,36.656 cw(c41.73,36.236) 41.73,36.83 cw(c41.73,37.424) U3.2@41.31,37.004 ; R8.2@44.182,36.561 ccw(c43.532,35.91) 43.532,36.83 ccw(c43.532,37.75) R8.2@44.182,37.099
NetR10_1: R10.1 U4.4 | length 10.4
  Top Layer w0.508: R10.1@9.002,39.15 cw(c8.351,38.499) 9.271,38.499 cw(c10.191,38.499) R10.1@9.54,39.15 ; R10.1 9.271,36.703 U4.4 ; 9.984,35.99 cw(c8.283,34.29) U4.4@10.688,34.29 ; 10.851,35.123 cw(c10.018,34.29) U4.4@11.196,34.29
NetR11_2: R11.2 U4.2 | length 7
  Top Layer w0.508: U4.2 20.828,37.084 R11.2 ; U4.2@21.498,36.656 cw(c22.531,35.623) 22.531,37.084 ; R11.2@24.624,36.815 ccw(c23.974,36.164) 23.974,37.084 ccw(c23.974,38.004) R11.2@24.624,37.353
NetR13_1: R13.1 USB.2 | length 9.3
  Top Layer w0.508: R13.1 53.207,24.854 USB.2 ; R13.1@51.499,23.4 ccw(c51.499,24.013) R13.1@51.933,23.579 ; R13.1@51.88,23.019 cw(c53.106,23.019) 52.239,23.886
NetR16_1: R16.1 USB.3 | length 9.9
  Top Layer w0.254: R16.1 R16.1@51.785,25.654
  Top Layer w0.508: R16.1@51.409,25.977 ccw(c52.189,26.756) 52.189,25.654 ; R16.1@51.768,26.336 ccw(c53.415,27.983) 53.415,25.654 ; R16.1@51.785,25.654 USB.3
NRST: C8.1 R18.1 U2.7 | length 16.4
  Top Layer w0.254: v1(29.616,21.615) 29.853,21.852 U2.7
  Bottom Layer w0.508: R18.1 27.65,21.107 C8.1 28.158,21.615 v1(29.616,21.615) ccw(c29.616,19.673) C8.1@28.159,20.957 ; R18.1@25.468,20.838 cw(c26.118,20.188) 26.118,21.107 cw(c26.118,22.027) R18.1@25.468,21.377 ; 26.436,21.107 ccw(c26.436,22.445) C8.1@27.382,21.499 ; 26.976,21.107 cw(c26.976,20.533) C8.1@27.382,20.939 ; C8.1@27.778,21.293 cw(c28.491,20.665) C8.1@28.491,21.615 ; v1@29.437,21.436 ccw(c29.003,21.002) 29.003,21.615 ccw(c29.003,22.229) v1@29.437,21.795
OSCIN: C7.2 U2.5 Y1.2 | length 26.3
  Top Layer w0.254: C7.2 24.138,26.932 ; C7.2@23.287,26.57 cw(c24.138,25.752) 24.138,26.932 ; C7.2@23.287,27.294 ccw(c24.138,28.112) 24.138,26.932 ; Y1.2@25.812,26.656 ccw(c24.493,25.337) 24.493,27.203 ccw(c24.493,29.069) Y1.2@25.812,27.75 ; Y1.2@25.992,26.836 ccw(c25.106,25.95) 25.106,27.203 ccw(c25.106,28.456) Y1.2@25.992,27.57 ; Y1.2@26.959,26.43 cw(c26.959,25.288) 27.766,26.096 ; Y1.2@27.224,27.203 ccw(c28.588,27.203) 27.624,26.238 ; Y1.2@27.478,27.203 ccw(c29.455,27.203) 28.057,25.805 ; Y1.2@27.732,27.203 ccw(c30.322,27.203) 28.491,25.371 ; U2.5 30.994,22.868 Y1.2 24.409,27.203 24.138,26.932
OSCOUT: C13.2 U2.6 Y1.1 | length 26.3
  Top Layer w0.254: C13.2 23.291,23.503 Y1.1 29.641,23.503 30.784,22.36 U2.6 ; C13.2@22.921,23.795 ccw(c23.625,24.499) 23.625,23.503 ; C13.2@23.1,23.974 ccw(c24.238,25.112) 24.238,23.503 ; C13.2@23.28,24.154 ccw(c24.851,25.725) 24.851,23.503 ; Y1.1@25.812,22.956 ccw(c24.493,21.637) 24.493,23.503 ccw(c24.493,25.369) Y1.1@25.812,24.05 ; Y1.1@25.992,23.136 ccw(c25.106,22.25) 25.106,23.503 ccw(c25.106,24.756) Y1.1@25.992,23.87 ; Y1.1@27.326,23.136 cw(c28.212,22.25) 28.212,23.503 cw(c28.212,24.756) Y1.1@27.326,23.87 ; Y1.1@27.506,22.956 cw(c28.825,21.637) 28.825,23.503 cw(c28.825,25.369) Y1.1@27.506,24.05
PA1: U2.11
PA2: U2.12
PA3: U2.13
PA4: R2.1 U2.14 | length 17.9
  Top Layer w0.254: v1(33.274,12.192) 37.048,15.966 U2.14 ; v1@33.274,12.573 ccw(c33.274,13.493) 33.924,12.842 ccw(c34.575,12.192) v1@33.655,12.192
  Bottom Layer w0.508: v1@33.02,12.192 cw(c34.246,12.192) 33.379,13.059 ; v1@33.094,12.372 ccw(c32.661,12.805) 33.274,12.805 ccw(c33.887,12.805) v1@33.454,12.372 ; v1(33.274,12.192) 33.274,12.954 34.806,14.486 R2.1 ; v1@33.528,12.192 cw(c35.981,12.192) 34.246,13.926 ; R2.1@35.662,14.217 ccw(c35.012,13.566) 35.012,14.486 ccw(c35.012,15.406) R2.1@35.662,14.755
PA5: R3.1 U2.15 | length 16.6
  Top Layer w0.254: U2.15 37.556,12.99 v1(38.354,12.192) ; v1@37.973,12.192 ccw(c37.053,12.192) 37.704,12.842 ccw(c38.354,13.493) v1@38.354,12.573
  Bottom Layer w0.508: v1@38.1,12.192 cw(c39.326,12.192) 38.459,13.059 ; v1@38.174,12.372 ccw(c37.741,12.805) 38.354,12.805 ccw(c38.967,12.805) v1@38.534,12.372 ; v1(38.354,12.192) 38.354,12.954 39.886,14.486 R3.1 ; v1@38.608,12.192 cw(c41.061,12.192) 39.326,13.926 ; R3.1@40.742,14.217 ccw(c40.092,13.566) 40.092,14.486 ccw(c40.092,15.406) R3.1@40.742,14.755
PA6: U2.16
PA7: R5.1 U2.17 | length 21.3
  Top Layer w0.254: U2.17 38.572,15.53 41.382,12.72 48.748,12.72 v1(49.276,12.192)
  Bottom Layer w0.508: v1(49.276,12.192) 49.276,12.7 50.935,14.359 R5.1 ; v1@49.53,12.192 cw(c51.37,12.192) 50.069,13.493 ; R5.1@51.918,14.09 ccw(c51.268,13.439) 51.268,14.359 ccw(c51.268,15.279) R5.1@51.918,14.628
PA8: U2.29
PA11: R13.2 U2.32 | length 8.2
  Top Layer w0.254: U2.32 48.935,22.868 R13.2 ; 47.369,22.868 ccw(c47.369,24.609) R13.2@48.6,23.378 ; 47.982,22.868 ccw(c47.982,23.995) R13.2@48.779,23.198 ; 48.096,22.868 cw(c48.096,22.156) R13.2@48.6,22.659
PA12: R15.1 R16.2 U2.33 | length 15.4
  Top Layer w0.254: U2.33 47.252,23.376 49.086,25.21 ; R16.2@48.727,26.426 ccw(c47.83,27.322) 49.098,27.322 ; R15.1@48.739,28.748 cw(c47.872,27.88) 49.098,27.88 cw(c50.325,27.88) R15.1@49.457,28.748 ; R16.2@48.842,25.621 cw(c48.618,25.21) 49.086,25.21 ; R16.2@48.906,26.246 ccw(c48.443,26.709) 49.098,26.709 ; 49.098,27.264 ccw(c50.283,27.264) R16.2@49.445,26.426 ; R15.1 49.098,26.079 R16.2 49.086,25.21 ; R16.2@49.33,25.621 ccw(c49.554,25.21) 49.086,25.21
PB0: R6.1 U2.18 | length 27.1
  Top Layer w0.254: U2.18 39.08,15.784 41.636,13.228 49.497,13.228 50.533,12.192 v1(54.61,12.192) ; v1@54.341,11.923 ccw(c53.69,11.272) 53.69,12.192 ccw(c53.69,13.112) v1@54.341,12.461
  Bottom Layer w0.508: v1(54.61,12.192) 54.61,12.7 56.269,14.359 R6.1 ; v1@54.864,12.192 cw(c56.704,12.192) 55.403,13.493 ; R6.1@56.998,14.09 ccw(c56.348,13.439) 56.348,14.359 ccw(c56.348,15.279) R6.1@56.998,14.628
PB6: R8.1 U2.42 | length 12.7
  Top Layer w0.254: U2.42 39.588,29.68 R8.1 ; 43.368,33.46 cw(c44.452,32.376) R8.1@44.452,33.909 ; 43.674,33.767 ccw(c43.024,34.417) R8.1@43.944,34.417 ; 43.801,33.894 cw(c44.452,33.243) R8.1@44.452,34.163
PB7: R11.1 U2.43 | length 22.2
  Top Layer w0.254: R11.1@24.894,34.163 cw(c24.894,32.63) 25.978,33.714 ; R11.1@24.894,34.417 cw(c24.894,33.497) 25.544,34.148 ; R11.1 27.819,31.873 36.926,31.873 39.08,29.719 U2.43 ; R11.1@25.402,34.671 ccw(c26.321,34.671) 25.671,34.021
PB12: P8.1 R19.2 U2.25 | length 28.4
  Top Layer w0.254: U2.25 44.442,19.312 46.507,17.247 P8.1 ; P8.1@54.068,16.806 ccw(c53.004,15.743) 53.004,17.247 ccw(c53.004,18.751) P8.1@54.068,17.687 ; P8.1@54.247,16.986 ccw(c53.618,16.356) 53.618,17.247 ccw(c53.618,18.137) P8.1@54.247,17.508
  Bottom Layer w0.254: R19.2@51.589,18.923 cw(c51.589,17.39) 52.673,18.474 ; R19.2@51.589,19.177 cw(c51.589,18.257) 52.239,18.908 ; R19.2 53.9,17.247 P8.1 ; R19.2@52.097,19.431 ccw(c53.017,19.431) 52.366,18.781 ; 52.407,18.74 ccw(c54.508,20.841) P8.1@54.508,17.87 ; 52.841,18.306 ccw(c54.508,19.974) P8.1@54.508,17.616 ; 53.274,17.873 ccw(c54.508,19.107) P8.1@54.508,17.362 ; 53.708,17.439 ccw(c54.508,18.24) P8.1@54.508,17.108
PB13: R1.1 U2.26 | length 27.4
  Top Layer w0.254: U2.26 44.696,19.82 46.279,18.237 v1(47.955,18.237) ; v1@47.686,17.968 ccw(c47.035,17.317) 47.035,18.237 ccw(c47.035,19.157) v1@47.686,18.507
  Bottom Layer w0.508: R1.1 32.215,15.85 45.568,15.85 v1(47.955,18.237) ; R1.1@30.852,14.994 ccw(c30.852,16.22) 31.719,15.353 ; R1.1@31.233,14.613 cw(c31.846,14.613) R1.1@31.412,15.047 ; v1@47.701,18.237 cw(c47.088,18.237) 47.522,17.804 cw(c47.955,17.37) v1@47.955,17.983
PB14: R4.1 U2.27 | length 15.8
  Top Layer w0.254: U2.27 44.907,20.328 45.728,19.507 v1@47.777,19.507 ; 46.642,19.507 ccw(c46.642,20.947) v1@47.66,19.929 ; 47.255,19.507 ccw(c47.255,20.334) v1@47.84,19.749 ; 47.378,19.507 cw(c47.378,19.108) v1@47.66,19.39
  Top Layer w0.508: v1@47.777,19.507 v1(47.93,19.66)
  Bottom Layer w0.508: R4.1 48.971,16.731 48.971,18.658 v1@47.97,19.66 ; R4.1@46.6,14.867 ccw(c46.6,16.093) 47.467,15.226 ; R4.1@46.981,14.486 cw(c47.594,14.486) R4.1@47.16,14.92 ; v1@47.93,19.406 cw(c47.93,18.696) 48.431,19.198 ; v1@48.184,19.66 ccw(c48.701,19.66) 48.335,19.294
PUL1: P1.1 Q1.3 | length 9
  Bottom Layer w0.508: P1.1@30.538,4.286 ccw(c29.244,5.579) 31.074,5.579 ; Q1.3@30.935,6.67 cw(c30.6,6.336) 31.074,6.336 cw(c31.547,6.336) Q1.3@31.212,6.67 ; P1.1@31.074,3.721 Q1.3 ; 31.074,5.166 ccw(c32.827,5.166) P1.1@31.587,3.926 ; Q1.3@31.074,6.393 ccw(c34.053,6.393) P1.1@31.946,4.286
PUL2: P3.1 Q4.3 | length 9.3
  Bottom Layer w0.508: P3.1@46.133,4.286 ccw(c43.858,6.561) Q4.3@47.076,6.561 ; P3.1@46.493,3.926 ccw(c45.085,5.334) 47.076,5.334 ; Q4.3@46.937,6.67 cw(c46.602,6.336) 47.076,6.336 cw(c47.549,6.336) Q4.3@47.214,6.67 ; P3.1@47.076,3.594 Q4.3 ; 47.076,5.411 ccw(c48.668,5.411) P3.1@47.542,4.286
PWM1: P6.1 R12.1 U4.3 | length 21.5
  Top Layer w0.508: U4.3 13.995,36.83 19.304,42.139 ; U4.3@12.608,36.656 cw(c13.028,36.236) 13.028,36.83 cw(c13.028,37.424) U4.3@12.608,37.004 ; P6.1@18.991,42.795 cw(c18.459,42.139) 19.304,42.139 ; P6.1 19.304,42.139 ; P6.1@19.617,42.795 ccw(c20.149,42.139) 19.304,42.139
  Bottom Layer w0.508: P6.1@19.304,42.684 cw(c19.304,42.104) P6.1@19.714,42.514 ; P6.1 19.304,42.924 R12.1 ; P6.1@19.8,43.18 ccw(c21.615,43.18) 20.331,41.897 ; 21.737,40.491 ccw(c22.604,41.358) R12.1@22.604,40.132 ; R12.1@22.044,40.185 cw(c21.61,39.751) R12.1@22.223,39.751
PWM2: P5.1 R9.1 U3.3 | length 23.2
  Top Layer w0.508: U3.3 34.011,36.83 39.878,42.697 P5.1 ; U3.3@32.42,36.656 cw(c32.84,36.236) 32.84,36.83 cw(c32.84,37.424) U3.3@32.42,37.004 ; 38.69,41.509 ccw(c37.019,43.18) P5.1@39.382,43.18 ; 39.557,42.377 ccw(c38.754,43.18) P5.1@39.89,43.18
  Bottom Layer w0.508: P5.1@39.878,42.684 cw(c39.878,42.104) P5.1@40.288,42.514 ; P5.1 39.878,42.924 R9.1 ; P5.1@40.374,43.18 ccw(c42.189,43.18) 40.905,41.897 ; 42.311,40.491 ccw(c43.178,41.358) R9.1@43.178,40.132 ; R9.1@42.618,40.185 cw(c42.184,39.751) R9.1@42.797,39.751
RXD1: P7.2 U2.31 | length 35.6
  Top Layer w0.254: U2.31 45.712,22.36 v1(46.177,21.895)
  Bottom Layer w0.254: v1@45.796,21.901 ccw(c44.929,21.916) 45.542,22.53 ; v1@46.171,22.276 cw(c46.156,23.143) 45.542,22.53 ; v1(46.177,21.895) 45.542,22.53 ; P7.2@51.25,43.221 ccw(c49.746,43.221) 50.809,44.285 ccw(c51.873,45.348) P7.2@51.873,43.844 ; P7.2@51.504,43.221 ccw(c50.613,43.221) 51.243,43.851 ccw(c51.873,44.481) P7.2@51.873,43.59 ; P7.2 50.742,44.352 48.425,44.352 45.542,41.469 45.542,22.53
SWCLK: P4.3 U2.37 | length 24.2
  Top Layer w0.254: U2.37@42.126,27.175 cw(c42.346,27.175) 42.19,27.331 ; U2.37 42.128,27.269 47.498,32.639 47.498,36.652 48.412,37.567 53.082,37.567 P4.3 ; P4.3@53.79,36.236 ccw(c52.286,36.236) 53.349,37.3 ccw(c54.413,38.363) P4.3@54.413,36.859 ; P4.3@54.044,36.236 ccw(c53.153,36.236) 53.783,36.866 ccw(c54.413,37.496) P4.3@54.413,36.605
SWIO: P4.2 U2.34 | length 20.3
  Top Layer w0.254: U2.34 45.061,23.884 47.943,26.766 47.943,29.887 51.873,33.817 P4.2 ; P4.2@51.432,35.795 cw(c50.369,34.732) 51.873,34.732 cw(c53.377,34.732) P4.2@52.314,35.795 ; P4.2@51.612,35.975 cw(c50.982,35.345) 51.873,35.345 cw(c52.764,35.345) P4.2@52.134,35.975
TXD1: P7.3 U2.30 | length 43.1
  Top Layer w0.254: U2.30 44.848,21.852 v1(46.177,20.523) ; v1@45.796,20.523 ccw(c44.876,20.523) 45.527,21.174 ccw(c46.177,21.824) v1@46.177,20.904
  Bottom Layer w0.254: 45.446,21.369 cw(c44.6,20.523) v1@45.796,20.523 ; 45.722,21.093 ccw(c46.177,21.548) v1@46.177,20.904 ; 45.88,20.935 cw(c45.467,20.523) v1@46.05,20.523 ; v1(46.177,20.523) 46.177,20.638 45.034,21.781 45.034,41.679 48.215,44.86 52.774,44.86 P7.3 ; P7.3@53.79,43.221 ccw(c52.286,43.221) 53.349,44.285 ccw(c54.413,45.348) P7.3@54.413,43.844 ; P7.3@54.044,43.221 ccw(c53.153,43.221) 53.783,43.851 ccw(c54.413,44.481) P7.3@54.413,43.59
pads on no net: U2.1 U2.3 U2.4 U2.10 U2.19 U2.20 U2.21 U2.22 U2.28 U2.38 U2.39 U2.40 U2.41 U2.45 U2.46 USB.6 USB.7 USB.8 USB.9 USB.MH1 USB.MH2

## Polygon pours and split planes (outlines as drawn)
GND on Top Layer "Top Layer-GND" (solid, remove dead copper, pour order 1000): 0.75,4 0.75,44 cw(c4,44) 4,47.25 63,47.25 cw(c63,44) 66.25,44 66.25,4 cw(c63,4) 63,0.75 4,0.75 cw(c4,4)
GND on Bottom Layer "Bottom Layer- GND" (solid, pour order 1000): 0.8,4 0.8,44 cw(c4,44) 4,47.2 63,47.2 cw(c63,44) 66.2,44 66.2,4 cw(c63,4) 63,0.8 4,0.8 cw(c4,4)

## Keep-outs
Keep-Out Layer:
  the board outline again, w0.254

## Silkscreen, mask and mechanical layers (free items; w line width, h text height)
Top Overlay:
  text "S1" at 18.5,45 h2
  text "S2" at 39,45 h2
  text "3V3" at 49.75,45 h1.8 r90
  text "RX1" at 52.25,45 h1.8 r90
  text "TX1" at 55,45 h1.8 r90
  text "GND" at 57.5,45 h1.8 r90
  text "-" at 13.75,44.75 h2.54
  text "+" at 16,44.75 h2.54
  text "-" at 34.25,44.75 h2.54
  text "+" at 36.75,44.75 h2.54
  text "3V3" at 49.894,38.127 h1.8 r90
  text "SIO" at 52.394,38.127 h1.8 r90
  text "SCK" at 55.144,38.127 h1.8 r90
  text "GND" at 57.644,38.127 h1.8 r90
  text "急停开关" at 58,14.75 h2
  text "GND" at 11,8.5 h2 r90
  text "5V" at 16,8.5 h2 r90
  text "GND" at 21,8.5 h2 r90
  text "7V5" at 26,8.5 h2 r90
  text "PUL1" at 31.75,8.5 h2 r90
  text "DIR1" at 36.75,8.5 h2 r90
  text "ENA1" at 42,8.5 h2 r90
  text "PUL2" at 47.5,8.5 h2 r90
  text "DIR2" at 52.5,8.5 h2 r90
  text "ENA2" at 57.75,8.5 h2 r90
Mechanical 1:
  lines w0.254: 0.8,4 ccw(c4,4) 4,0.8 63,0.8 ccw(c63,4) 66.2,4 66.2,44 ccw(c63,44) 63,47.2 4,47.2 ccw(c4,44) 0.8,44 0.8,4

## Text inside footprints (layer, text, board x,y; h text height)
U1: Top Overlay "1" at 9.87,19.387 h1.27